# Altium PCB PCB1.PcbDoc
Units mm, origin at the board's own origin, x right, y up, seen from the top; angles counter-clockwise.
Board outline 15 x 25 mm, 4 copper layers (Top Layer, Internal Plane 1, Internal Plane 2, Bottom Layer); 4 components, 4 nets, 20 pads, 24 vias.
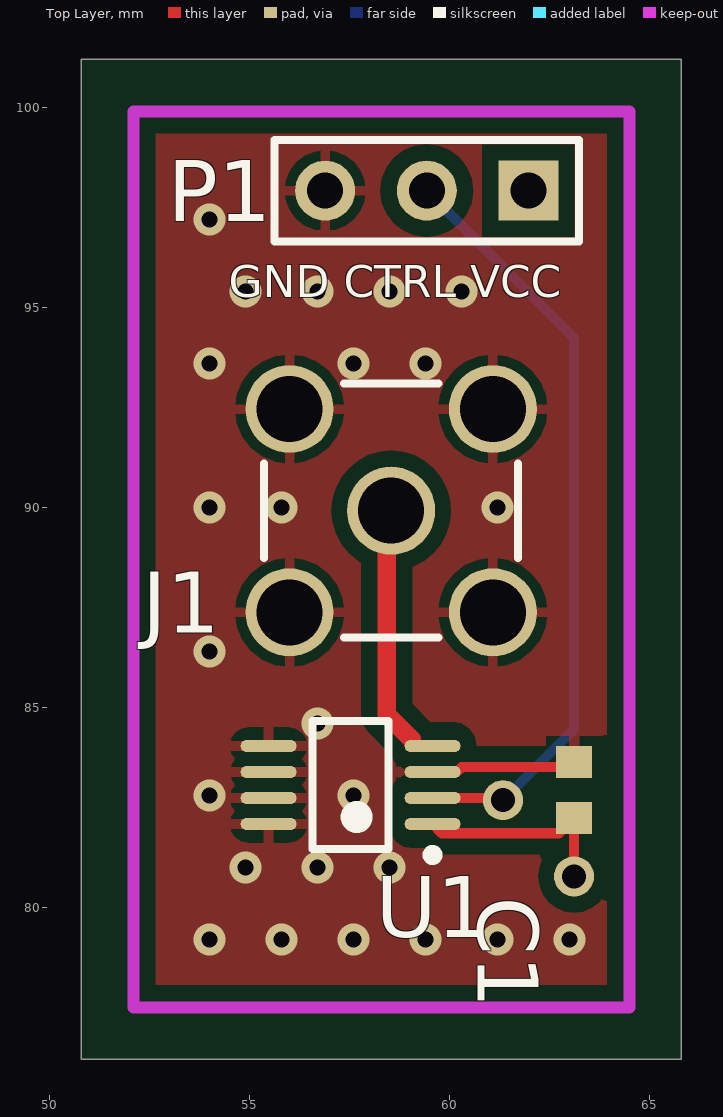
[diagram p0: Top Layer view]
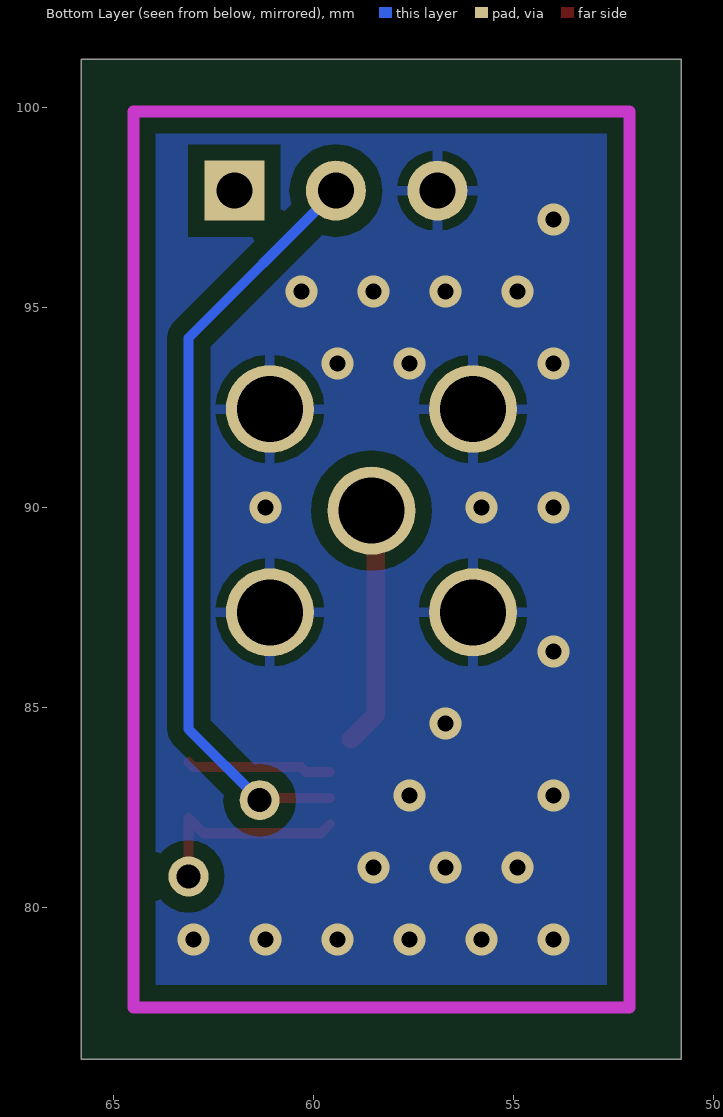
[diagram p1: Bottom Layer view, seen from below]
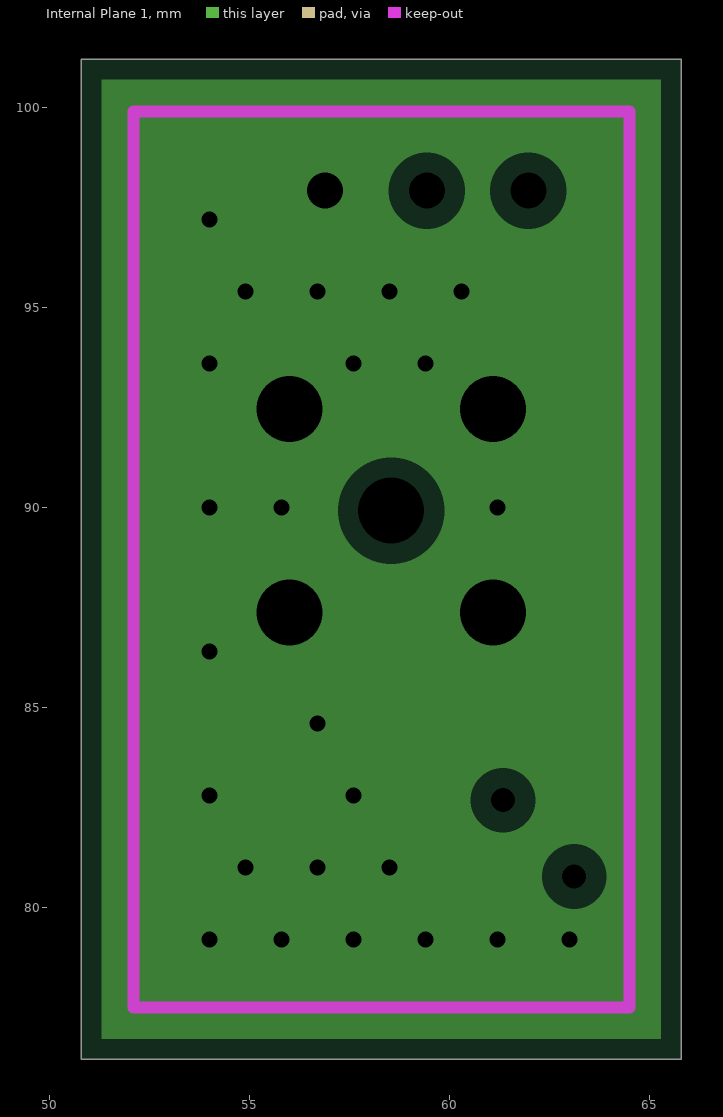
[diagram p2: Internal Plane 1, clearances drawn from the general rule]
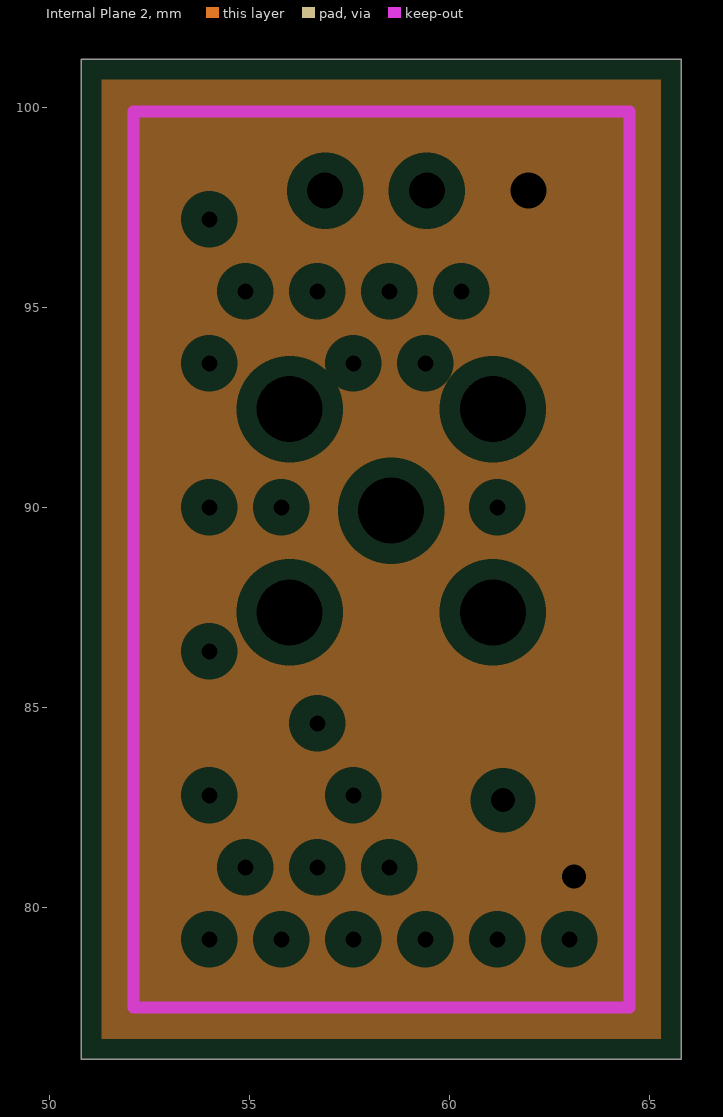
[diagram p3: Internal Plane 2, clearances drawn from the general rule]

## Layer stack, top to bottom
Top Solder: solder mask 0.0102, Solder Resist, Dk 3.5
Top Layer: signal copper 0.0356
Dielectric1: core 0.32, FR-4, Dk 4.8
Internal Plane 1: plane copper 0.0356
Dielectric2: prepreg 0.32, FR-4, Dk 4.8
Internal Plane 2: plane copper 0.0356
Dielectric3: core 0.32, FR-4, Dk 4.8
Bottom Layer: signal copper 0.0356
Bottom Solder: solder mask 0.0102, Solder Resist, Dk 3.5

## Board outline
50.8,76.2 65.8,76.2 65.8,101.2 50.8,101.2

## Design rules (kind name [scope] priority, off if disabled: settings)
Clearance [All] p1: gap=0.2
PlaneClearance [All] p1: clearance=0.508
PlaneConnect [All] p1: planeconnectstyle=Relief reliefexpansion=0.508 reliefentries=4 reliefconductorwidth=0.254 reliefairgap=0.254
PolygonConnect [All] p1: connectstyle=Relief reliefconductorwidth=0.254 reliefentries=4 polygonreliefangle="90 Angle" airgapwidth=0.254
RoutingVias [All] p1: holewidth=0.6 width=1 viastyle="Through Hole" minholewidth=0.711 minwidth=1.27 maxholewidth=0.711 maxwidth=1.27
SolderMaskExpansion [All] p1: expansion=0.102
Width [All] p1: maxlimit=2 minlimit=0.2 preferedwidth=0.2
28 further rules are at their usual default settings.

## Components (designator, comment, footprint, x,y, rotation, side; value= is the part's Value field where it differs from the comment)
C1 "Cap" 1608[0603] 63.119,82.931 r270 top
J1 "SMA" ROS-32K101-400L5_V 58.547,89.916 r0 top
P1 "Header 3" HDR1X3 61.976,97.917 r180 top
U1 "ADG902BRMZ" ADI-RM-8_L 57.531,83.058 r180 top

## Footprints (in the part's own frame and the unit in brackets; to place one, negate y for a bottom-side part, rotate by r counter-clockwise, add the part's x,y. Pads: shape width x height; smd on the part's side, far side on the other; paste and mask are expansions set on the pad)
1608[0603] [mm] "Chip Capacitor, Body 1.6x0.8mm, IPC High Density"
  rect 0.8x0.9 smd: 1(-0.7,0) 2(0.7,0)
  body extent -0.87,-0.48 0.87,0.48, height 1.3
ADI-RM-8_L [mm] "TSOP, 8-Leads, Body 3x3mm, Pitch 0.65mm, IPC High Density"
  oval 1.4x0.3 smd: 1(-2.05,0.975) 2(-2.05,0.325) 3(-2.05,-0.325) 4(-2.05,-0.975) 5(2.05,-0.975) 6(2.05,-0.325) 7(2.05,0.325) 8(2.05,0.975)
  silkscreen extent -2.17,-1.6 0.95,1.87, body extent -1.6,-1.6 1.6,1.6, height 1.1
HDR1X3 [mm] "Connector; Header; 3 Position"
  rect 1.5x1.5 hole 0.9: 1(0,0)
  round 1.5 hole 0.9: 2(2.54,0) 3(5.08,0)
  silkscreen extent -1.27,-1.27 6.35,1.27
ROS-32K101-400L5_V [mm] "SMA Straight Jack, 6.35x6.35x9.5mm, Rosenberger Recommended"
  round 2.2 hole 1.65: 1(0,0) MH(-2.54,-2.54) MH(-2.54,2.54) MH(2.54,-2.54) MH(2.54,2.54)
  silkscreen extent -3.17,-3.18 3.18,3.17, body extent -3.17,-3.17 3.18,3.18, height 9.5

## Part data
C1: "Capacitor"
J1: library part CMP-0751-00001-1, "SMA Straight Jack, Up to 18 GHz, -55 to 155 degC"
P1: "Header, 3-Pin"
U1: library part CMP-0290-00055-1, "RF Switch, Wideband, 40 dB Isolation at 1 GHz, CMOS 1.65 V to 2.75 V, SPST Switches, RM-8, Pb-Free, 50 Tube"

## Free pads (board coordinates)
  round 1 hole 0.6: 0(61.341,82.677) 0(63.119,80.772)

## Via types
v1: diameter 0.8, hole 0.4, Top Layer to Bottom Layer, tented both sides, 24 vias

## Nets (pads, with @x,y where several pads share a name; then routed paths per layer and width w, separated by ;. In a path a pad name is that pad's centre, name@x,y a point inside that pad or via, vN(x,y) a via of type N, cw(c..) or ccw(c..) an arc to the next point about the centre after c; other vN are vias at no path point)
CTRL: P1.2 pad.0@61.341,82.677 U1.2 | length 19
  Top Layer w0.254: U1.2 61.031,82.733 pad.0@61.087,82.677
  Bottom Layer w0.254: P1.2 63.119,94.234 63.119,84.455 pad.0@61.341,82.677
GND: C1.1 J1.MH P1.3 U1.3 U1.5 U1.6 U1.7 U1.8 | length 3.6
  Top Layer w0.254: U1.3 60.187,83.383 60.308,83.504 62.992,83.504 C1.1
  other v1: 54,79.2 55.8,79.2 57.6,79.2 59.4,79.2 61.2,79.2 63,79.2 54.9,81 56.7,81 58.5,81 54,82.8 57.6,82.8 56.7,84.6 54,86.4 54,90 55.8,90 61.2,90 54,93.6 57.6,93.6 59.4,93.6 54.9,95.4 56.7,95.4 58.5,95.4 60.3,95.4 54,97.2
NetJ1_1: J1.1 U1.4 | length 6
  Top Layer w0.2: J1.1@58.438,89.807 J1.1
  Top Layer w0.47: J1.1@58.438,89.807 58.438,84.818 59.055,84.201
VCC: C1.2 P1.1 pad.0@63.119,80.772 U1.1 | length 5.3
  Top Layer w0.254: U1.1 59.814,81.85 62.738,81.85 C1.2 pad.0@63.119,80.772

## Polygon pours and split planes (outlines as drawn)
GND on Top Layer "Bottom Layer-No Net" (solid, pour order 4): 52.1,99.9 64.5,99.9 64.5,77.5 64.276,77.724 52.197,77.724
GND on Bottom Layer "Bottom Layer-No Net" (solid, pour order 8): 52.1,99.9 64.5,99.9 64.5,77.724 64.373,77.597 52.1,77.597
GND on Internal Plane 1 (split plane): 65.29,76.71 51.31,76.71 51.31,100.69 65.29,100.69
VCC on Internal Plane 2 (split plane): 65.29,76.71 51.31,76.71 51.31,100.69 65.29,100.69

## Keep-outs
Keep-Out Layer:
  lines w0.3: 52.1,77.5 64.5,77.5 64.5,99.9 52.1,99.9 52.1,77.5

## Silkscreen, mask and mechanical layers (free items; w line width, h text height)
Top Overlay:
  text "GND CTRL VCC" at 54.483,95.25 h0.8
Drill Drawing:
  text ".LEGEND" at 70.88,81.28 h1.52
  text "Drill Drawing." at 70.88,78.74 h1.52

## Dimensions
52.1,77.5 to 64.5,77.5 on Mechanical 1
52.1,77.5 to 52.1,99.9 on Mechanical 1